# Altium PCB EFNMR_RT_V1.PcbDoc
Units mil, origin at the board's own origin, x right, y up, seen from the top; angles counter-clockwise.
Board outline 3520 x 4010 mil, 2 copper layers (Top Layer, Bottom Layer); 73 components, 53 nets, 220 pads, 258 vias.
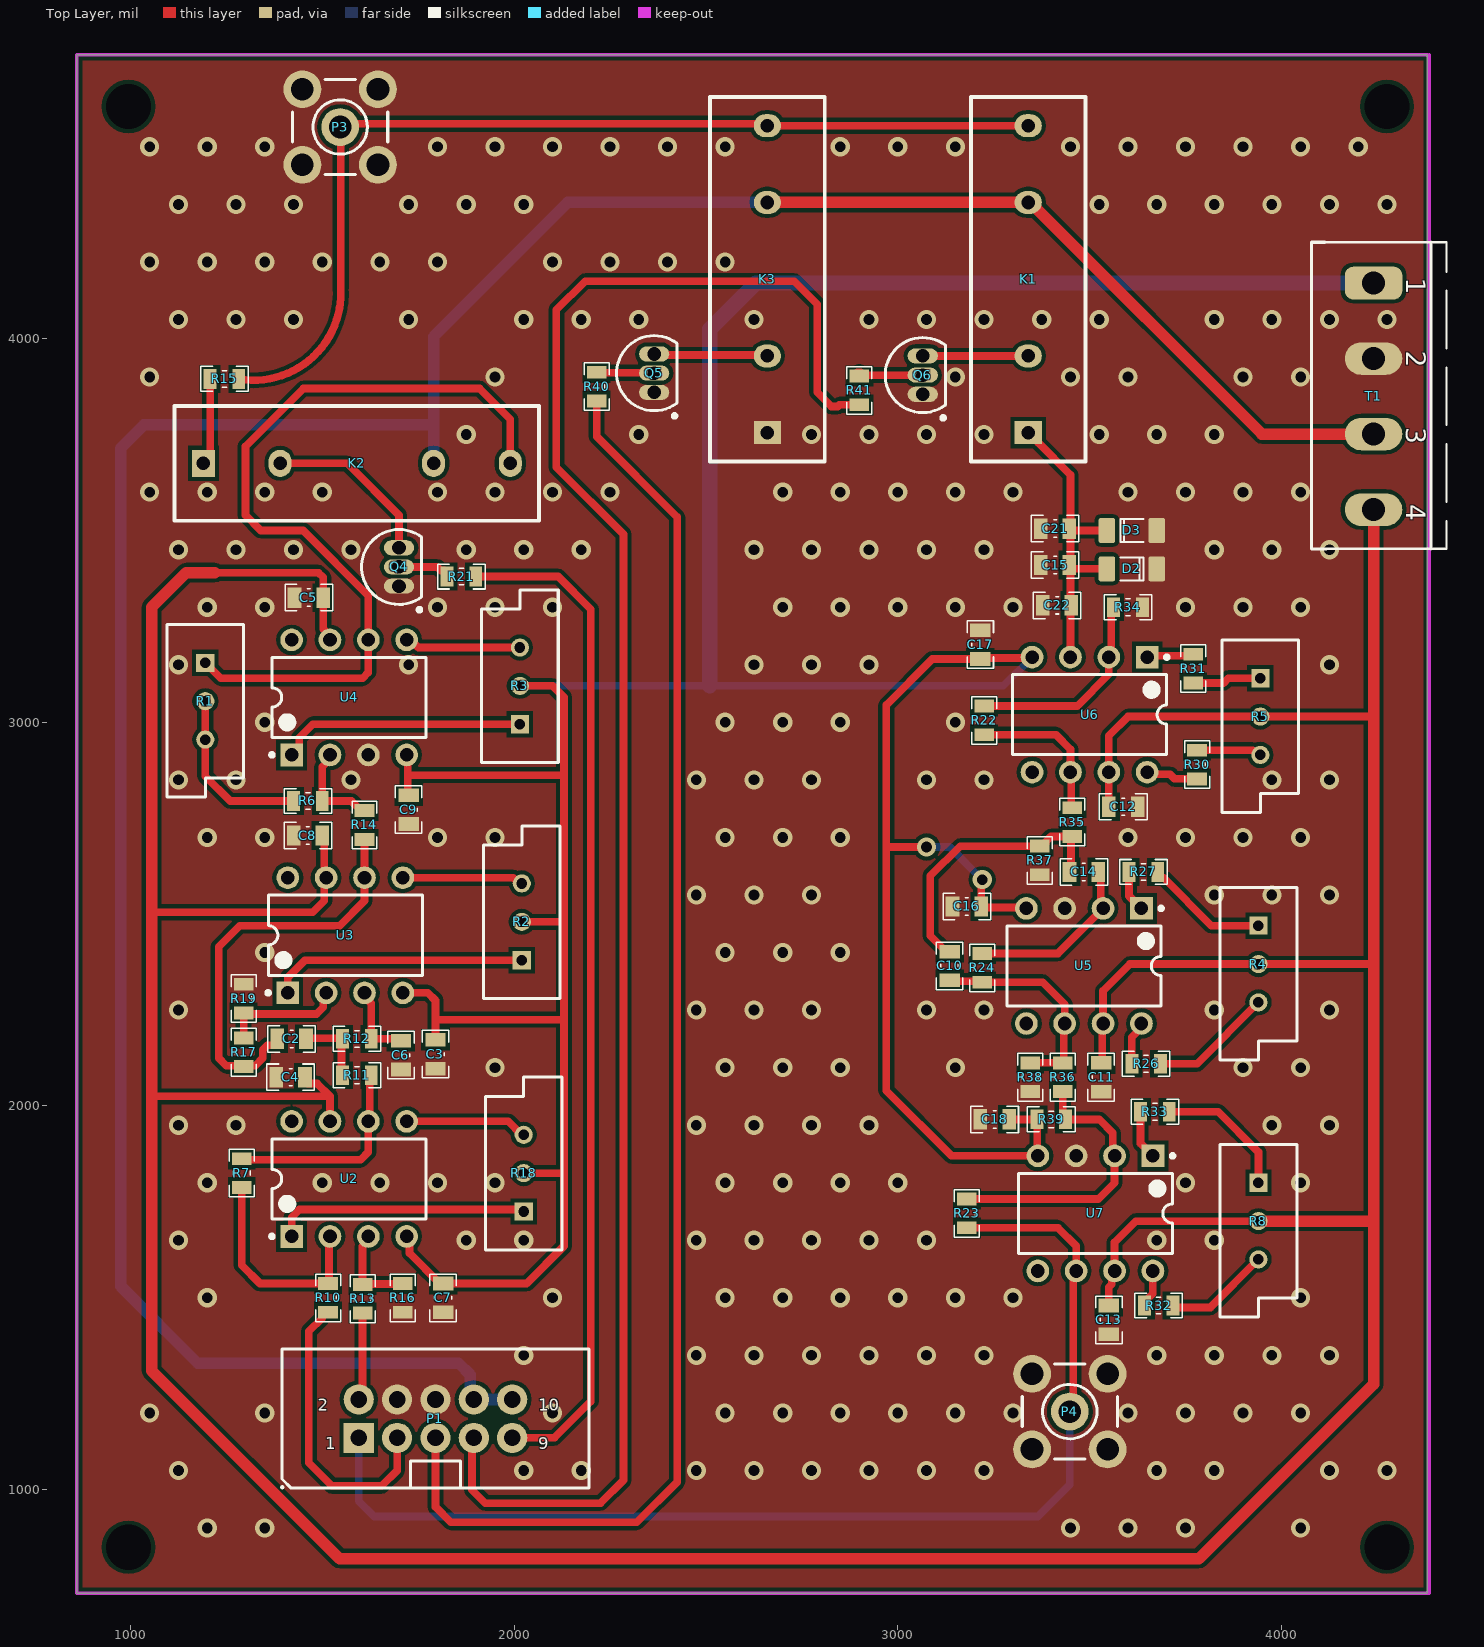
[diagram p0: Top Layer view]
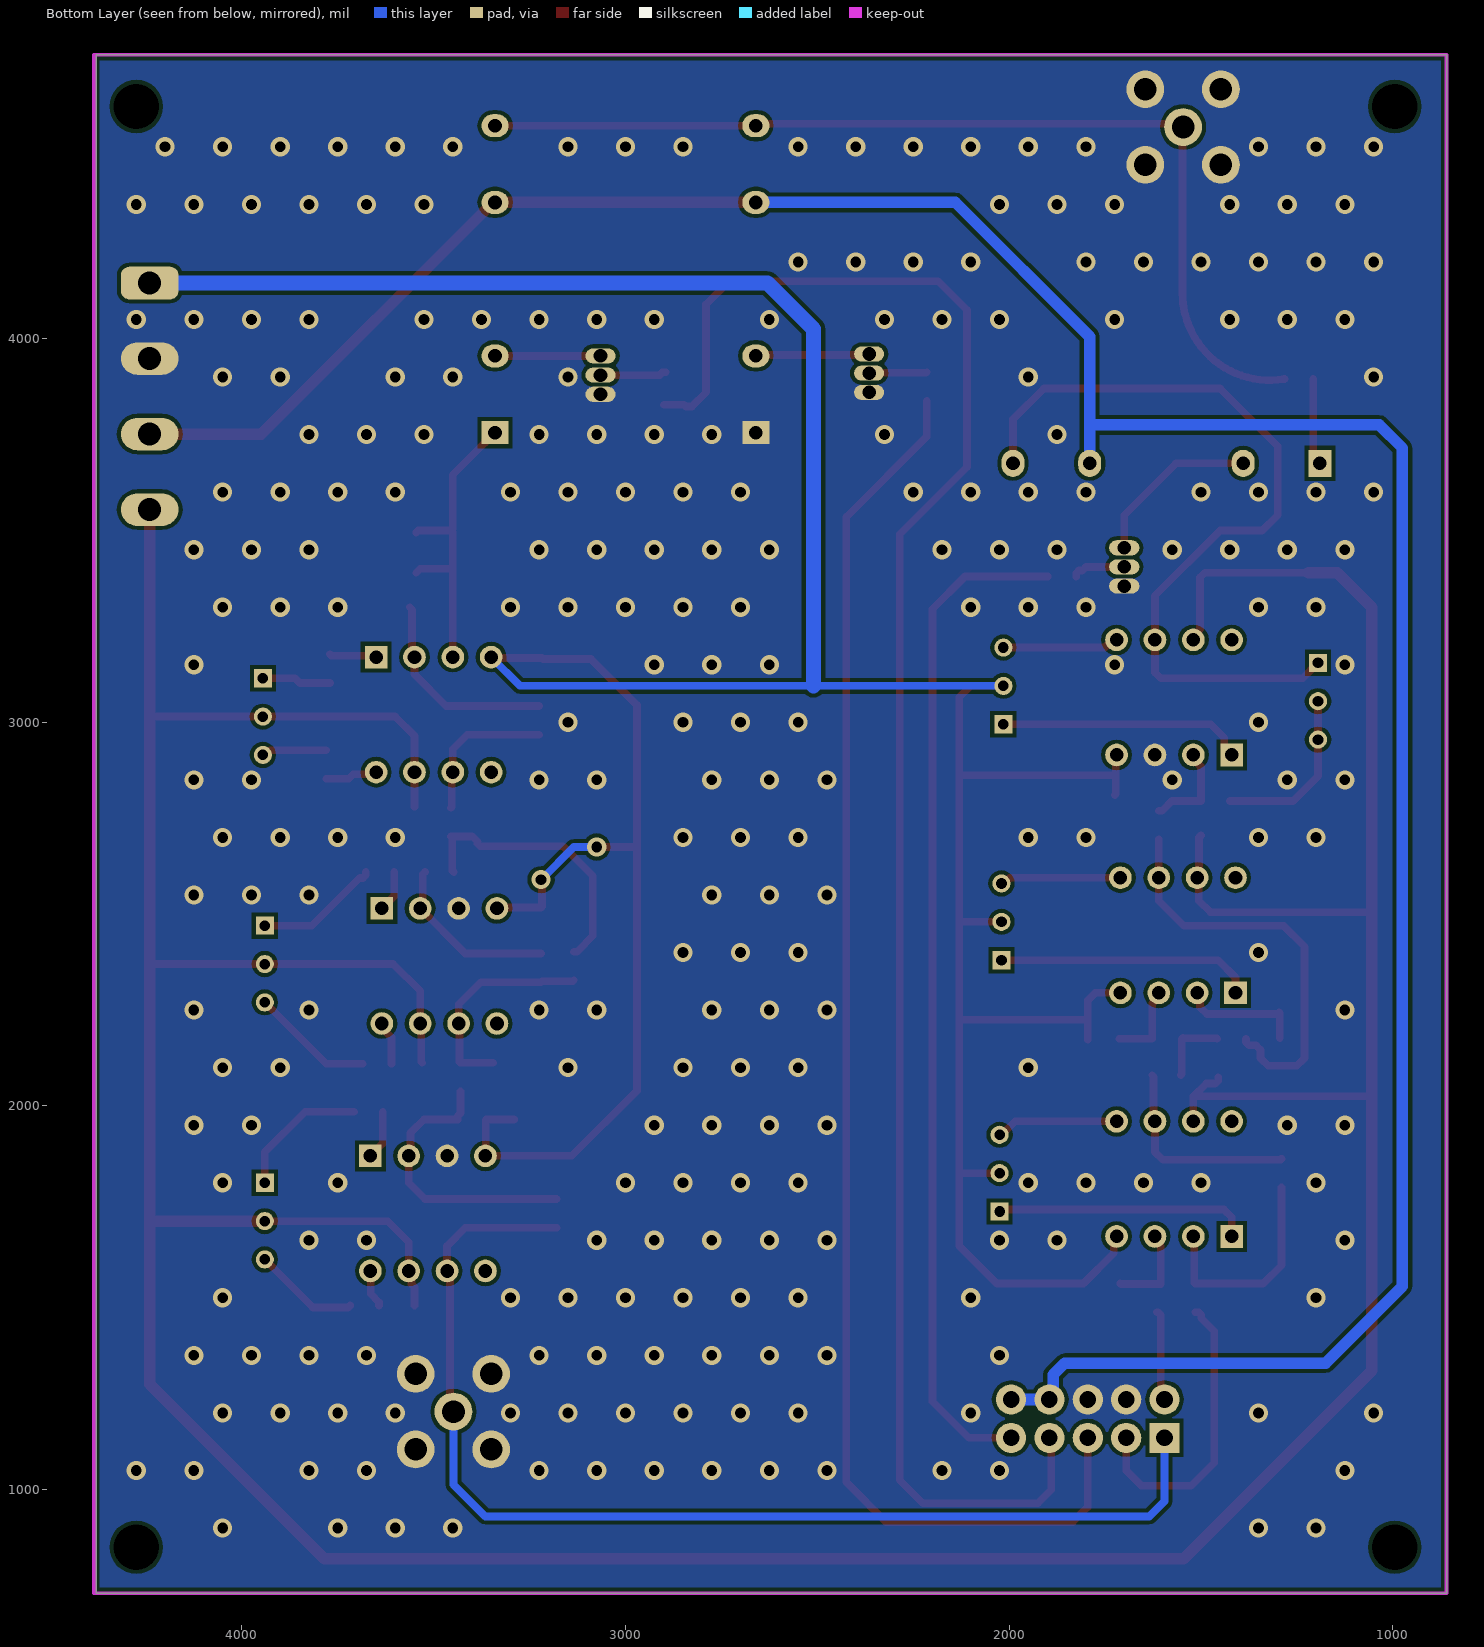
[diagram p1: Bottom Layer view, seen from below]
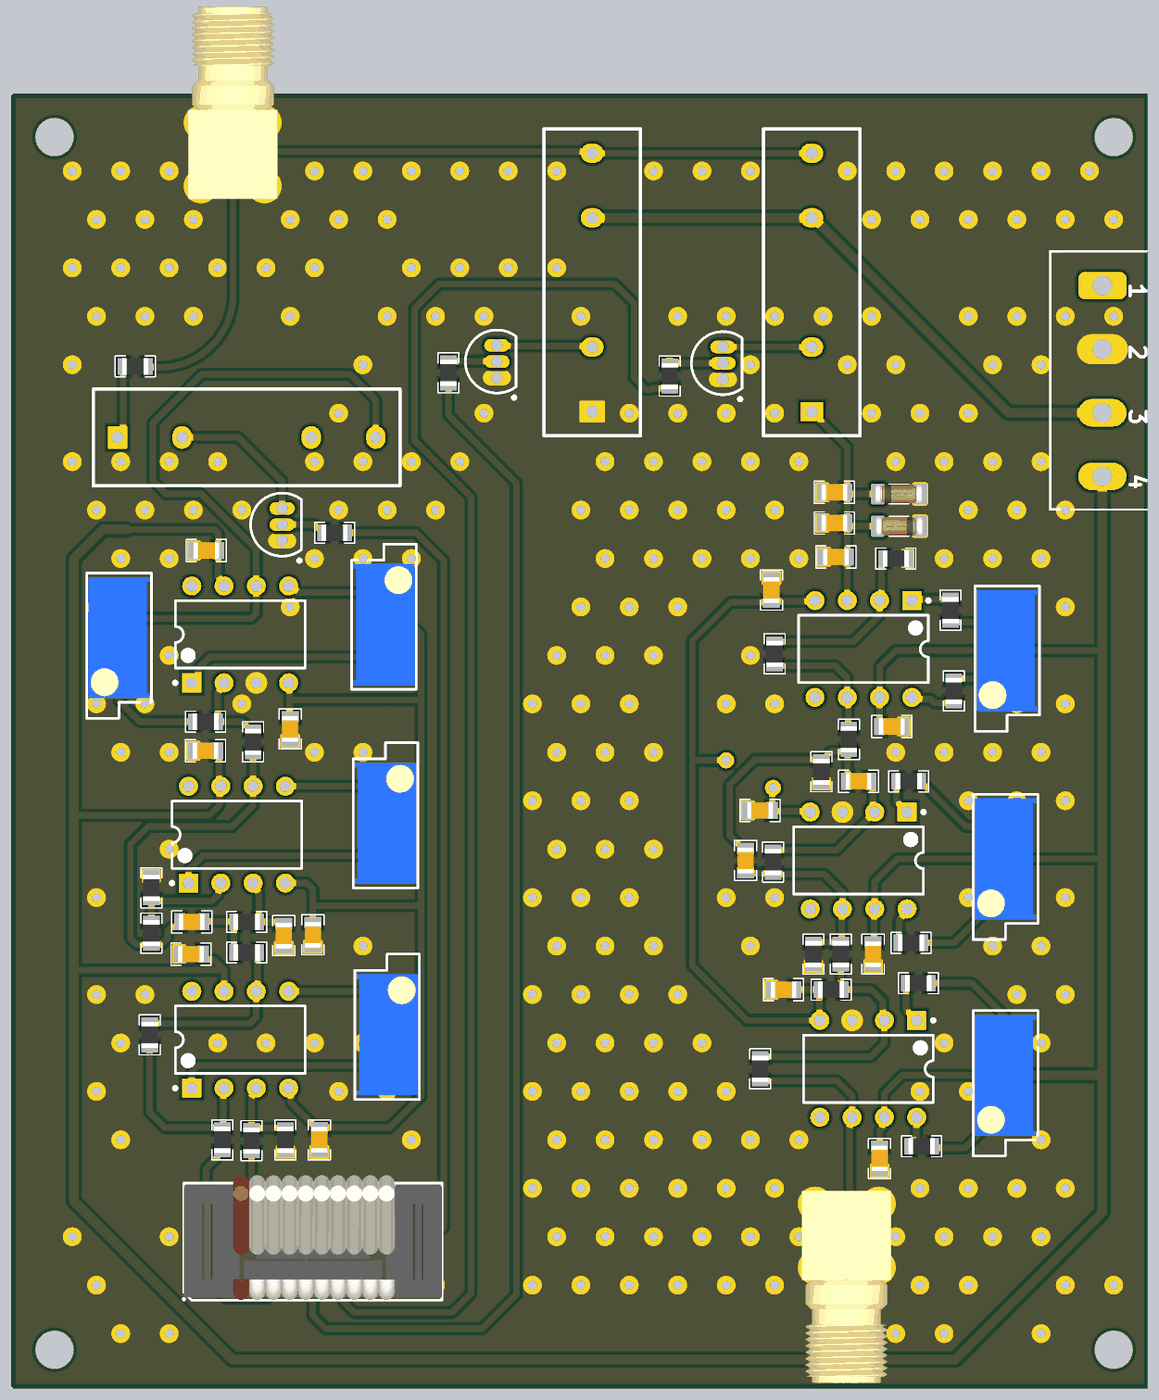
[diagram p2: 3D render of the assembled board from above, using the file's embedded part models]

## Layer stack, top to bottom
Top Solder: solder mask 0.4, Solder Resist, Dk 3.5
Top Layer: signal copper 1.4
Dielectric 1: dielectric 12.6, FR-4, Dk 4.8
Bottom Layer: signal copper 1.4
Bottom Solder: solder mask 0.4, Solder Resist, Dk 3.5

## Board outline
860,730 4380,730 4380,4740 860,4740

## Design rules (kind name [scope] priority, off if disabled: settings)
Clearance [All] p1: gap=10 ignorepadtopadclearanceinfootprint=FALSE except(0: Arc-Hole Track-Hole SMDPad-Hole THPad-Hole Via-Hole Fill-Hole Poly-Hole Region-Hole Text-Hole)
Height [All] p1: minheight=0 maxheight=40000 prefheight=500
PolygonConnect [All] p1: connectstyle=Direct reliefconductorwidth=10 reliefentries=4 polygonreliefangle="90 Angle" airgapwidth=10
RoutingVias [All] p1: holewidth=28 width=50 viastyle="Through Hole" minholewidth=28 minwidth=50 maxholewidth=28 maxwidth=50
SolderMaskExpansion [All] p1: expansion=4
Width [All] p1: maxlimit=100 minlimit=10 preferedwidth=15 minimp=50.000000 maximp=50.000000 favimp=50.000000
29 further rules are at their usual default settings.

## Components (designator, comment, footprint, x,y, rotation, side; value= is the part's Value field where it differs from the comment)
C2 "Cap" CAP0805 1420,2175 r180 top value=1nF
C3 "Cap" CAP0805 1795,2135 r90 top value=100nF
C4 "Cap" CAP0805 1417.6,2075 r0 top value=100nF
C5 "Cap" CAP0805 1465,3325 r0 top value=100nF
C6 "Cap" CAP0805 1705,2132.4 r90 top value=1nF
C7 "Cap" CAP0805 1815,1500 r90 top value=100nF
C8 "Cap" CAP0805 1462.6,2705 r0 top value=100nF
C9 "Cap" CAP0805 1725,2772.4 r90 top value=100nF
C10 "10nF" CAP0805 3135,2365 r270 top
C11 "Cap" CAP0805 3530,2075 r90 top value=100nF
C12 "Cap" CAP0805 3587.6,2780 r180 top value=100nF
C13 "Cap" CAP0805 3550,1442.6 r90 top value=100nF
C14 "10nF" CAP0805 3485,2610 r0 top
C15 "Cap" CAP0805 3410,3410 r180 top value=18nF
C16 "Cap" CAP0805 3180,2520 r0 top value=100nF
C17 "Cap" CAP0805 3215,3202.4 r270 top value=100nF
C18 "Cap" CAP0805 3252.6,1965 r0 top value=100nF
C21 "Cap" CAP0805 3410,3505 r180 top value=18nF
C22 "Cap" CAP0805 3415,3305 r180 top value=18nF
D2 "1N4148" "SOD80, LL-34" 3610,3400 r180 top
D3 "1N4148" "SOD80, LL-34" 3610,3500 r0 top
K1 "Relay-SPST" HE3351A0500 3340,3755 r90 top
K2 "Relay-SPST" HE3351A0500 1190,3675 r0 top
K3 "Relay-SPST" HE3351A0500 2660,3755 r90 top
P1 "Header 5X2" "IDC2.54-10PIN WITH CABLE" 1795,1185 r0 top
P3 "COAX-M" SMA_RA_F 1547.58,4550.58 r90 top
P4 "COAX-M" SMA_RA_F 3447.42,1204.42 r270 top
Q4 "2N3904" TO-92A 1700,3405 r0 top
Q5 "2N3904" TO-92A 2365,3910 r0 top
Q6 "2N3904" TO-92A 3065,3905 r0 top
R1 "RPot" MULTITURN_TRIMMER_3296_132 1195,3155 r270 top value=10K
R2 "RPot" MULTITURN_TRIMMER_3296_132 2020,2380 r90 top value=10K
R3 "RPot" MULTITURN_TRIMMER_3296_132 2015,2995 r90 top value=10K
R4 "RPot" MULTITURN_TRIMMER_3296_132 3940,2470 r270 top value=1K
R5 "RPot" MULTITURN_TRIMMER_3296_132 3945,3115 r270 top value=1K
R6 "10K" RES0805 1462.6,2795 r180 top
R7 "2K" RES0805 1290,1825 r90 top
R8 "RPot" MULTITURN_TRIMMER_3296_132 3940,1800 r270 top value=1K
R10 "2K" RES0805 1515,1500 r90 top
R11 "47K" RES0805 1590,2080 r180 top
R12 "47K" RES0805 1590,2175 r0 top
R13 "2K" RES0805 1605,1497.6 r90 top
R14 "10K" RES0805 1610,2732.4 r90 top
R15 "1K" RES0805 1245,3895 r0 top
R16 "2K" RES0805 1710,1500 r90 top
R17 "12K" RES0805 1295,2140 r90 top
R18 "RPot" MULTITURN_TRIMMER_3296_132 2025,1725 r90 top value=10K
R19 "47K" RES0805 1295,2280 r270 top
R21 "1K" RES0805 1862.4,3380 r0 top
R22 "330K" RES0805 3225,3005 r90 top
R23 "15K" RES0805 3180,1720 r90 top
R24 "150K" RES0805 3220,2360 r90 top
R26 "4.7K" RES0805 3647.4,2110 r180 top
R27 "4.7K" RES0805 3640,2610 r180 top
R30 "4.7K" RES0805 3780,2890 r270 top
R31 "4.7K" RES0805 3770,3140 r90 top
R32 "4.7K" RES0805 3680,1480 r180 top
R33 "4.7K" RES0805 3670,1985 r180 top
R34 "330" RES0805 3600,3300 r180 top
R35 "15K" RES0805 3455,2740 r90 top
R36 "1.5K" RES0805 3430,2075 r90 top
R37 "370" RES0805 3370,2640 r270 top
R38 "2K" RES0805 3345,2075 r270 top
R39 "91K" RES0805 3400,1965 r180 top
R40 "1K" RES0805 2215,3875 r270 top
R41 "1K" RES0805 2900,3865 r270 top
T1 "1753479" "MSTBV 2,5/4-G-5" 4240,3849.72 r270 top
U2 "LF411ACN" LT-N8-8 1570,1810 r90 top
U3 "LF411ACN" LT-N8-8 1560,2445 r90 top
U4 "LF411ACN" LT-N8-8 1570,3065 r90 top
U5 "LT1007CN8" LT-N8-8 3485,2365 r270 top
U6 "LT1007CN8" LT-N8-8 3500,3020 r270 top
U7 "LT1007CN8" LT-N8-8 3515,1720 r270 top

## Footprints (in the part's own frame and the unit in brackets; to place one, negate y for a bottom-side part, rotate by r counter-clockwise, add the part's x,y. Pads: shape width x height; smd on the part's side, far side on the other; paste and mask are expansions set on the pad)
CAP0805 [mm] "Chip Capacitor, 2-Leads, Body 2/00x1/25mm, IPC Medium Density DESIGNER:ABBAS BASEREH"
  rect 0.9x1.35 smd: 1(-0.95,0) 2(0.95,0)
  silkscreen extent -1.58,-0.87 1.58,0.87, body extent -1.02,-0.65 1.02,0.65, height 0.5
HE3351A0500 [mm]
  rect 1.524x1.8 hole 0.9: 1(0,0)
  oval 1.524x1.8 hole 0.9: 2(5.08,0) 3(15.24,0) 4(20.32,0)
  silkscreen extent -1.91,-3.8 22.22,3.8, body extent -1.91,-3.89 22.3,3.89, height 9.75
"IDC2.54-10PIN WITH CABLE" [mm] "Connector; IDC, Low Profile Male Header, Thru-Hole; 10 Position; Vertical; Pitch 2.54 mm; 20.32 x 9.2 x 9.45 mm (LxWxH) DESIGNER : ABBAS BASEREH"
  rect 2x2 hole 1.1: 1(-5.08,-1.27)
  round 2 hole 1.1: 2(-5.08,1.27) 3(-2.54,-1.27) 4(-2.54,1.27) 5(0,-1.27) 6(0,1.27) 7(2.54,-1.27) 8(2.54,1.27) 9(5.08,-1.27) 10(5.08,1.27)
  silkscreen extent -10.16,-4.6 10.16,4.6, body extent -10.15,-4.6 10.17,5.22, height 133.79
LT-N8-8 [mm] "DIP, 8-Leads, Body 10.16x6.48mm, Pitch 2.54mm"
  rect 1.5x1.5 hole 0.9: 1(-3.81,3.81)
  round 1.5 hole 0.9: 2(-3.81,1.27) 3(-3.81,-1.27) 4(-3.81,-3.81) 5(3.81,-3.81) 6(3.81,-1.27) 7(3.81,1.27) 8(3.81,3.81)
  silkscreen extent -3.93,-5.1 2.65,5.23, body extent -3.95,-5.07 3.95,5.07, height 3.94
"MSTBV 2,5/4-G-5" [mil] "Header, Nominal current: 12 A Rated voltage (III/2): 320 V Number of positions: 4 Pitch: 5mm Color: green Contact surface: Tin Assembly: Soldering  DESIGNER ABBAS BASEREH"
  rrect50% 85x150 hole 60: 1(-295.28,0)
  oval 85x150 hole 60: 2(-98.43,0) 3(98.43,0) 4(295.28,0)
  silkscreen extent -402,-161 398,190, body extent -394,-153 394,186, height 472
MULTITURN_TRIMMER_3296_132 [mm]
  rect 1.2x1.2 hole 0.7: 1(0,0)
  round 1.2 hole 0.7: 2(5.08,0) 3(2.54,0)
  silkscreen extent -2.54,-2.54 8.89,2.54, body extent -2.21,-2.41 7.32,2.42, height 11.55
RES0805 [mm] "Chip Resistor, 2-Leads, Body 2/00x1/25mm, IPC Medium Density DESIGNER:ABBAS BASEREH"
  rect 0.85x1.3 smd: 1(-0.95,0) 2(0.95,0)
  silkscreen extent -1.58,-0.82 1.58,0.82, body extent -1.02,-0.65 1.02,0.65, height 0.5
SMA_RA_F [mm]
  round 2.5 hole 1.5: 1(0.025,0.025) 2(-2.475,-2.475) 2(-2.475,2.525) 2(2.525,-2.475) 2(2.525,2.525)
  silkscreen extent -3.12,-3.12 3.18,3.18, body extent -3.48,-3.5 11.62,3.5, height 9.86
"SOD80, LL-34" [mm] "Diode, MiniMELF"
  round 0.5 on Mech15: 0(0,0)
  rrect25% 1.1x1.65 smd: 1(1.65,0) 2(-1.65,0)
  silkscreen extent -0.76,-0.76 0.76,0.76, body extent -1.88,-0.8 1.82,0.8, height 1.6
TO-92A [mm] "TO, Flat Index; 3 In-Line, Axial Leads; Body Dia. 4.5mm; Leads 0.51 x 0.48 mm (max)"
  oval 2x1 hole 0.9: 1(0,-1.27) 2(0,0) 3(0,1.27)
  silkscreen extent -2.48,-2.95 1.5,2.48, body extent -2.48,-2.5 1.5,2.5, height 6.86

## Part data
C2 C3 C4 C5 C6 C7 C8 C9 C11 C12 C13 C15 C16 C17 C18 C21 C22: "Capacitor", LatestRevisionDate=17-Jul-2002, LatestRevisionNote="Re-released for DXP Platform.", PackageDescription="Radial Cap, Thru-Hole; 2 Leads; 0.3 in Pin Spacing", PackageReference=RAD-0.3, Published=8-Jun-2000, Publisher="Altium Limited"
C10 C14: library part Cap, "Capacitor", LatestRevisionDate=17-Jul-2002, LatestRevisionNote="Re-released for DXP Platform.", PackageDescription="Radial Cap, Thru-Hole; 2 Leads; 0.3 in Pin Spacing", PackageReference=RAD-0.3, Published=8-Jun-2000, Publisher="Altium Limited"
D2 D3: "High Conductance Fast Diode", Code_JEDEC=DO-204-AH, ComponentLink1Description="Manufacturer Link", ComponentLink1URL=http://www.fairchildsemi.com/, ComponentLink2Description=Datasheet, ComponentLink2URL=http://www.fairchildsemi.com/ds/1N%2F1N4148.pdf, DatasheetDocument=1997, LatestRevisionDate=17-Jul-2002, LatestRevisionNote="Re-released for DXP Platform.", PackageReference=DO-35, Published=8-Jun-2000, Publisher="Altium Limited"
K1 K2 K3: "Single-Pole Single-Throw Relay", LatestRevisionDate=17-Jul-2002, LatestRevisionNote="Re-released for DXP Platform.", PackageReference=MODULE4, Published=24-Mar-1999, Publisher="Altium Limited"
P1: "Header, 5-Pin, Dual row", LatestRevisionDate=17-Jul-2002, LatestRevisionNote="Re-released for DXP Platform.", Publisher="Altium Limited"
P3 P4: "RF Coaxial PCB Connector, MMCX; Thru-Hole, Vertical Mount Plug,  50 Ohm Impedance", PackageDocument="Rev. A, 16-Jun-1997", ComponentLink1Description="Manufacturer Link", ComponentLink1URL=http://www.amphenolrf.com/, DatasheetDocument=30-May-2003, DrillSize="Corresponds to nominal value.", LatestRevisionDate=15-Jul-2004, LatestRevisionNote="Component Replaced.", PackageReference=908-21103, PCB_Layout="Complies with manufacturer's recommendation.", Published=15-Jul-2004, Publisher="Altium Limited"
Q4 Q5 Q6: "NPN General Purpose Amplifier", ComponentLink1Description="Manufacturer Link", ComponentLink1URL=http://www.fairchildsemi.com/, ComponentLink2Description=Datasheet, ComponentLink2URL=http://www.fairchildsemi.com/ds/2N%2F2N3904.pdf, DatasheetVersion=1997, LatestRevisionDate=15-Jan-2003, LatestRevisionNote="PCB Footprint 'BCY-W3/D4.7' replaced", PackageDescription="TO, Flat Index; 3 In-Line, Axial Leads; Body Dia. 4.5mm; Leads 0.51 x 0.48 mm (max)", PackageReference=TO-92A, PackageVersion=Sep-1998, Published=8-Jun-2000, Publisher="Altium Limited"
R1 R2 R3 R4 R5 R8 R18: "Potentiometer", LatestRevisionDate=17-Jul-2002, LatestRevisionNote="Re-released for DXP Platform.", PackageDescription="Variable Resistor, Thru-Hole; 3 Leads", PackageReference=VR5, Published=8-Jun-2000, Publisher="Altium Limited", Set Position=0.5, Sim Note="Enter the Resistance value and the set point into parameter fields."
R6 R7 R10 R11 R12 R13 R14 R15 R16 R17 R19 R21 R22 R23 R24 R26 R27 R30 R31 R32 R33 R34 R35 R36 R37 R38 R39 R40 R41: library part Res1, "Resistor", LatestRevisionDate=17-Jul-2002, LatestRevisionNote="Re-released for DXP Platform.", PackageDescription="Axial Device, Thru-Hole; 2 Leads; 0.3 in Pin Spacing", PackageReference=AXIAL-0.3, Published=8-Jun-2000, Publisher="Altium Limited"
T1: library part CON_Phoenix_MSTBV_04, "4 Pitch: 5 mm Color: green Contact surface: Tin Assembly", Manufacturer="PHOENIX CONTACT", Max Current="12 A", Voltage="320 V", Category=Connector, ComponentLink1Description="Header, Nominal current: 12 A Rated voltage (III/2): 320 V Number of positions: 4 Pitch: 5 mm Color: green Contact surface: Tin Assembly: Soldering  DESIGNER:ABBAS BASEREH", ComponentLink2Description=Reference, Connector Type="PCB Terminal Block", Designer="ABBAS BASEREH", Mounting Technology=Through-Hole, Part.No=1753479, Pin Count=4, Positions=4, Revision 1=2017-3-1, Status=Unreleased
U2 U3 U4: "Low Offset, Low Drift JFET Input Operational Amplifier, 8-pin MDIP", Manufacturer="National Semiconductor", PackageTopMarking=NSUZXYTTE#*LF*411ACN, PowerWise=N, Code_JEDEC=MS-001-BA, ComponentLink1Description="Manufacturer URL", ComponentLink1URL=http://www.national.com/, ComponentLink2Description="LF411 Datasheet", ComponentLink2URL=http://www.national.com/ds/LF/LF411.pdf, ComponentLink3Description="LF411 Web Page", ComponentLink3URL=http://www.national.com/pf/LF/LF411.html, ComponentLink4Description="N08E Package Page", ComponentLink4URL=http://www.national.com/packaging/folders/n08e.html, CompType=Amplifiers, DatasheetVersion=Aug-2000, High-Reliability=Y, PackageDescription="MDIP, .365 x .250 x .130in, 8 Lead, .100in Pitch", PackageReference=N08E, PackageVersion="revG, May-2006", PartNumber=LF411ACN, PinCount=8, RoHS=N
U5 U6 U7: "Single Channel, Low Noise, High Speed Precision Operational Amplifier, 8 MHz Typical GBW, 2.5 V/us Typical SR, 4 to 44 V, 8-Pin DIP (N8-8), Commerical", Linear Technology Part Number=LT1007, Manufacturer="Linear Technology", Supplier Part Number 1=LT1007CN8-ND, Channels (#)=1, ComponentLink1Description="Manufacturer URL", ComponentLink1URL=http://www.linear.com/, ComponentLink2Description=Datasheet, ComponentLink2URL=http://cds.linear.com/docs/en/datasheet/1007dicedwffa.pdf, ComponentLink3Description="Package Specification", ComponentLink3URL=http://cds.linear.com/docs/en/packaging/05081510_I_N8.pdf, DatasheetVersion="Rev. A", GBW (MHz) Typical=8, Is (mA) Typical=2.6, Mounting Technology="Surface Mount", PackageDescription="8-Lead PDIP, Body 10.16 x 6.48 mm, Pitch 2.54 mm", PackageReference=LT-N8-8, PackageVersion="Rev I", PartNumber=LT1007CN8, SR (V/us) Typical=2.5, Supplier 1=Digi-Key, Type=VFB, Vos (mV) Typical=0.01, Vs Max (V)=44, Vs Min (V)=4

## Free pads (board coordinates)
  round 60 hole 118.11: 2(4275,850) 3(995,850) 4(995,4605) 5(4275,4605)

## Via types
v1: diameter 50, hole 28, Top Layer to Bottom Layer, 258 vias

## Nets (pads, with @x,y where several pads share a name; then routed paths per layer and width w, separated by ;. In a path a pad name is that pad's centre, name@x,y a point inside that pad or via, vN(x,y) a via of type N, cw(c..) or ccw(c..) an arc to the next point about the centre after c; other vN are vias at no path point)
+5VI: K1.3 K2.3 K3.3 P1.8 P1.10 T1.3 | length 7374.3
  Top Layer w30: K3.3 3345.43,4355 3949.13,3751.3 T1.3
  Bottom Layer w30: K2.3 1790,3775 ; P1.10 P1.8 1885.67,1244.33 1885.67,1299.33 1855,1330 1175,1330 975,1530 975,3715 1035,3775 1790,3775 ; K3.3 2140,4355 1790,4005 1790,3775
+12VI: C4.2 C5.2 C8.2 C11.2 C12.2 C13.2 R4.3 R5.3 R8.3 T1.4 U2.7 U3.7 U4.7 U5.7 U6.7 U7.7 | length 12447.7
  Top Layer w20: 1055,2035 1065,2025 1520,2025 ; 1055,2505 1475,2505 1505.47,2535.47 1505.47,2590.47 U3.7 1505,2600 1505,2700 C8.2 ; 1220,3390 1490,3390 1502.4,3377.6 C5.2 1502.4,3243.17 1520,3225.57 U4.7 ; C4.2 1455,2066.14 1462.72,2058.43 1486.57,2058.43 1520,2025 ; U2.7 1520,2025 ; C11.2 3532.5,2114.9 3532.5,2212.5 U5.7 3535,2300 3605,2370 R4.3 4240,2370 ; C13.2 3550,1527.72 3557.53,1535.24 3557.53,1562.53 U7.7 3565,1645 3620,1700 R8.3 ; C12.2 3550.1,2780.1 3550.1,2869.9 U6.7 3550,2965 3600,3015 R5.3 4240,3015
  Top Layer w30: 1220,3390 1145,3390 1055,3300 1055,2505 1055,2035 1055,1310 1545,820 3785,820 4240,1275 4240,1700 4240,2370 4240,3015 T1.4 ; R8.3 4230,1700
-12VI: C3.2 C7.2 C9.2 C16.2 C17.2 C18.2 R2.3 R3.3 R18.3 R39.2 T1.1 U2.4 U3.4 U4.4 U5.4 U6.4 U7.4 | length 9961.8
  Top Layer w20: U3.4 1775,2295 1795,2275 1795,2225 ; U2.4 1727.47,1652.53 1727.47,1616.07 1806.14,1537.4 C7.2 2032.4,1537.4 2130,1635 2130,1825 ; U4.4 1722.5,2912.5 1722.5,2862.4 ; C9.2 1722.5,2812.3 1722.5,2862.4 ; C3.2 1795,2225 ; R3.3 2100,3095 2130,3065 2130,2865 ; R2.3 2130,2480 ; R18.3 2130,1825 ; v1(3075,2675) 2970,2675 ; v1(3220,2590) 3217.4,2587.4 C16.2 3219.9,2517.5 3332.5,2517.5 U5.4 ; C18.2 R39.2 3363.8,1963.8 3363.8,1871.2 3362.6,1870 3140,1870 2970,2040 2970,2675 ; U6.4 3347.5,3167.5 3217.5,3167.5 C17.2 3090,3165 2970,3045 2970,2675 ; 1722.5,2862.4 2127.4,2862.4 2130,2865 ; 1795,2225 2130,2225 ; 2130,1825 2130,2225 ; 2130,2225 2130,2480 ; 2130,2480 2130,2865
  Bottom Layer w20: R3.3 2510,3095 3275,3095 U6.4 ; v1(3075,2675) 3135,2675 v1(3220,2590)
  Bottom Layer w40: 2510,3095 2510,4025 2630,4145 T1.1
Negative: P1.3 R10.1 | length 774.9
  Top Layer w20: R10.1 1506.14,1462.6 1499.41,1455.87 1499.41,1447.01 1465,1412.6 1465,1070 1525,1010 1655,1010 1695,1050 P1.3
NetC2_1: C2.1 R11.2 R12.1 | length 191.6
  Top Layer w20: C2.1 1458.92,2176.52 1546.08,2176.52 1547.6,2178.03 1550.1,2175.53 1550.1,2082.5 R11.2
NetC2_2: C2.2 R14.1 R17.1 U3.6 | length 1087.5
  Top Layer w20: C2.2 1382.6,2166.14 1374.88,2158.43 1356.72,2158.43 1345,2146.71 1345,2125 1325,2105 1250,2105 1230,2125 1230,2415 1285,2470 1545,2470 1610,2535 U3.6 R14.1
NetC6_2: C6.2 R12.2 U3.3 | length 212.4
  Top Layer w20: U3.3 1610,2284.43 1627.4,2267.03 R12.2 C6.2@1712.6,2175
NetC10_1: C10.1 C14.1 R35.1 R37.1 | length 734.4
  Top Layer w20: C10.1 3126.14,2402.4 3085,2443.54 3085,2600 3162.4,2677.4 R37.1 3378.86,2677.4 3385.59,2684.13 3385.59,2688.78 3399.41,2702.6 R35.1 3451.3,2698.9 3451.3,2613.7 C14.1
NetC14_2: C14.2 R24.2 U5.2 | length 463.9
  Top Layer w20: R24.2 3417.4,2397.4 U5.2 3528.7,2521.3 3528.7,2603.7 C14.2
NetC15_1: C15.1 C21.1 C22.1 D2.1 D3.2 K1.1 U6.3 | length 822
  Top Layer w20: K1.1 3345.43,3755 3365.43,3735 3365.43,3729.57 3450,3645 C21.1@3450,3505 ; U6.3 3450,3305 C15.1@3450,3400 ; D2.1@3545.04,3390 3535.04,3400 C15.1@3450,3400 ; D3.2@3545.04,3495 3540.04,3500 3455.12,3500 3450,3494.88 C15.1@3450,3400
NetK1_2: K1.2 Q6.3 | length 275
  Top Layer w20: Q6.3 K1.2
NetK2_1: K2.1 R15.1 | length 227.3
  Top Layer w20: K2.1 1207.6,3692.6 R15.1
NetK2_2: K2.2 Q4.3 | length 450.9
  Top Layer w20: K2.2 1565,3675 1700,3540 Q4.3
NetK2_4: K2.4 R1.1 U4.6 | length 2135
  Top Layer w20: R1.1 1235,3115 1605,3115 1620,3130 U4.6 1620,3330 1450,3500 1340,3500 1300,3540 1300,3720 1450,3870 1910,3870 1990,3790 K2.4
NetK3_2: K3.2 Q5.3 | length 297.1
  Top Layer w20: Q5.3 2367.5,3957.5 2657.5,3957.5 K3.2
NetQ4_2: Q4.2 R21.1 | length 140.5
  Top Layer w20: Q4.2 1800,3405 1809.41,3395.59 1818.27,3395.59 1825,3388.86 R21.1
NetQ5_2: Q5.2 R40.1 | length 151
  Top Layer w20: R40.1 2216.2,3911.2 2363.8,3911.2 Q5.2
NetQ6_2: Q6.2 R41.1 | length 173.1
  Top Layer w20: R41.1@2895,3912.4 2903.86,3912.4 2911.26,3905 Q6.2
NetR1_2: R1.2 R1.3 R6.2 | length 452.1
  Top Layer w20: R1.3 R1.2 1195,2860 1260,2795 R6.2
NetR2_1: R2.1 U3.1 | length 668.6
  Top Layer w20: U3.1 1410,2335 1455,2380 R2.1
NetR2_2: R2.2 U3.5 | length 316.2
  Top Layer w20: U3.5 1997.63,2595 2012.63,2580 R2.2
NetR3_1: R3.1 U4.1 | length 642.8
  Top Layer w20: U4.1 1439.53,2934.53 1439.53,2959.53 1475,2995 R3.1
NetR3_2: R3.2 U4.5 | length 303.3
  Top Layer w20: U4.5 1730.57,3215 1750.57,3195 R3.2
NetR4_1: R4.1 R27.1 | length 325.8
  Top Layer w20: R27.1 3677.4,2601.14 3684.13,2594.41 3692.99,2594.41 3817.4,2470 R4.1
NetR4_2: R4.2 R26.1 | length 321.5
  Top Layer w20: R26.1 3780,2110 R4.2
NetR5_1: R5.1 R31.1 | length 180.1
  Top Layer w20: R31.1 3848.92,3102.6 3861.32,3115 R5.1
NetR5_2: R5.2 R30.1 | length 170.1
  Top Layer w20: R30.1 3925.23,2927.4 3937.63,2915 R5.2
NetR6_1: R6.1 R14.2 U4.2 | length 248.7
  Top Layer w20: U4.2 1520,2904.43 1500,2884.43 R6.1 1575.94,2795 1601.14,2769.8 R14.2
NetR7_1: R7.1 R10.2 U2.2 | length 572
  Top Layer w20: R7.1 1290,1585 1337.6,1537.4 R10.2 1517.5,1539.9 1517.5,1657.5 U2.2
NetR7_2: R7.2 R11.1 U2.6 | length 542.3
  Top Layer w20: R7.2 1292.4,1860 1600,1860 1620,1880 U2.6 1623.7,1963.7 1623.7,2076.3 R11.1
NetR8_1: R8.1 R33.1 | length 356.1
  Top Layer w20: R33.1 3835,1985 3940,1880 R8.1
NetR8_2: R8.2 R32.1 | length 276.4
  Top Layer w20: R32.1 3722.4,1475 3815,1475 R8.2
NetR13_2: R13.2 R16.2 U2.3 | length 237.2
  Top Layer w20: U2.3 1620,1649.43 1605,1634.43 R13.2 1606.2,1536.2 1708.8,1536.2 R16.2
NetR17_2: R17.2 R19.2 U3.2 | length 322.3
  Top Layer w20: R17.2 R19.2@1295,2240 ; R19.2@1296.2,2243.8 R19.2 R19.2@1295,2240 ; U3.2 1502.53,2287.53 1502.53,2257.53 1485,2240 R19.2@1295,2240
NetR18_1: R18.1 U2.1 | length 665.4
  Top Layer w20: U2.1 1420,1710 1440,1730 2020,1730 R18.1
NetR18_2: R18.2 U2.5 | length 319.5
  Top Layer w20: U2.5 1984.17,1960 2019.17,1925 R18.2
NetR22_1: R22.1 R35.2 U6.6 | length 395.2
  Top Layer w20: R22.1 3412.4,2967.6 3450,2930 U6.6 3452.5,2867.5 3452.5,2779.9 R35.2
NetR22_2: R22.2 R34.2 U6.2 | length 539.4
  Top Layer w20: R22.2 3467.4,3042.4 3550,3125 U6.2 3556.3,3176.3 3556.3,3293.7 R34.2
NetR23_2: R23.2 R36.1 R39.1 U7.2 | length 747.5
  Top Layer w20: R23.2 3522.4,1757.4 3565,1800 U7.2 3560.47,1874.53 3560.47,1929.53 3525,1965 R39.1 3437.4,1973.86 3430,1981.26 R36.1
NetR26_2: R26.2 U5.8 | length 115.4
  Top Layer w20: R26.2 3610,2179.43 3635,2204.43 U5.8
NetR27_2: R27.2 U5.1 | length 108.4
  Top Layer w20: R27.2 3602.6,2547.4 U5.1
NetR30_2: R30.2 U6.8 | length 137.2
  Top Layer w20: U6.8 3655.74,2864.26 3709.53,2864.26 3721.19,2852.6 R30.2
NetR31_2: R31.2 U6.1 | length 123.1
  Top Layer w20: U6.1 3653.7,3173.7 3766.3,3173.7 R31.2
NetR32_2: R32.2 U7.8 | length 99.3
  Top Layer w20: R32.2 3642.6,1488.86 3664.21,1510.47 3664.21,1569.21 U7.8
NetR33_2: R33.2 U7.1 | length 128.4
  Top Layer w20: R33.2 3632.6,1902.4 U7.1
OUT_BANDPASS: C10.2 R24.1 R36.2 R38.1 U5.6 | length 565.6
  Top Layer w20: C10.2 3137.5,2325.1 3217.5,2325.1 R24.1 3377.4,2322.6 3435,2265 U5.6 3432.5,2212.5 3432.5,2114.9 R36.2 R38.1
Positive: P1.2 R13.1 | length 237.8
  Top Layer w20: P1.2 1605,1245 1605,1455.87 1611.73,1462.6 R13.1@1615,1462.6
Receiver_EN: P1.7 R41.2 | length 4786.8
  Top Layer w20: P1.7 1890,1130 1890,1000 1925,965 2225,965 2285,1025 2285,3490 2110,3665 2110,4075 2185,4150 2730,4150 2790,4090 2790,3860 2826.72,3823.28 2843.28,3823.28 2847.6,3827.6 R41.2
SGND: C3.1 C4.1 C5.1 C6.1 C7.1 C8.1 C9.1 C11.1 C12.1 C13.1 C15.2 C16.1 C17.1 C18.1 C21.2 C22.2 D2.2 D3.1 K3.1 P1.4 P1.6 P3.2 P4.2 Q4.1 Q5.1 Q6.1 R16.1 R19.1 R34.1 R37.2 R38.2 T1.2 U4.3 U5.3 U7.3
  other v1: 1200,900 1350,900 3450,900 3600,900 3750,900 4050,900 1125,1050 2025,1050 2175,1050 2475,1050 2625,1050 2775,1050 2925,1050 3075,1050 3225,1050 3675,1050 3825,1050 4125,1050 4275,1050 1050,1200 1350,1200 2100,1200 2550,1200 2700,1200 2850,1200 3000,1200 3150,1200 3300,1200 3600,1200 3750,1200 3900,1200 4050,1200 2025,1350 2475,1350 2625,1350 2775,1350 2925,1350 3075,1350 3225,1350 3675,1350 3825,1350 3975,1350 4125,1350 1200,1500 2100,1500 2550,1500 2700,1500 2850,1500 3000,1500 3150,1500 3300,1500 4050,1500 1125,1650 1875,1650 2025,1650 2475,1650 2625,1650 2775,1650 2925,1650 3075,1650 3675,1650 3825,1650 1200,1800 1500,1800 1650,1800 1800,1800 1950,1800 2550,1800 2700,1800 2850,1800 3000,1800 3750,1800 4050,1800 1125,1950 1275,1950 2475,1950 2625,1950 2775,1950 2925,1950 3975,1950 4125,1950 1950,2100 2550,2100 2700,2100 2850,2100 3150,2100 3900,2100 4050,2100 1125,2250 2475,2250 2625,2250 2775,2250 3075,2250 3225,2250 3825,2250 4125,2250 1350,2400 2550,2400 2700,2400 2850,2400 2475,2550 2625,2550 2775,2550 3825,2550 3975,2550 4125,2550 1200,2700 1350,2700 1800,2700 1950,2700 2550,2700 2700,2700 2850,2700 3600,2700 3750,2700 3900,2700 4050,2700 1125,2850 1275,2850 1575,2850 2475,2850 2625,2850 2775,2850 3075,2850 3225,2850 3975,2850 4125,2850 1350,3000 2550,3000 2700,3000 2850,3000 3150,3000 1125,3150 1725,3150 2625,3150 2775,3150 2925,3150 4125,3150 1200,3300 1350,3300 1800,3300 1950,3300 2100,3300 2700,3300 2850,3300 3000,3300 3150,3300 3300,3300 3750,3300 3900,3300 4050,3300 1125,3450 1275,3450 1425,3450 1575,3450 1875,3450 2025,3450 2175,3450 2625,3450 2775,3450 2925,3450 3075,3450 3225,3450 3825,3450 3975,3450 4125,3450 1050,3600 1200,3600 1350,3600 1500,3600 1800,3600 1950,3600 2100,3600 2250,3600 2700,3600 2850,3600 3000,3600 3150,3600 3300,3600 3600,3600 3750,3600 3900,3600 4050,3600 1875,3750 2325,3750 2775,3750 2925,3750 3075,3750 3225,3750 3525,3750 3675,3750 3825,3750 1050,3900 1950,3900 3150,3900 3450,3900 3600,3900 3900,3900 4050,3900 1125,4050 1275,4050 1425,4050 1725,4050 2025,4050 2175,4050 2325,4050 2625,4050 2925,4050 3075,4050 3225,4050 3375,4050 3525,4050 3825,4050 3975,4050 4125,4050 4275,4050 1050,4200 1200,4200 1350,4200 1500,4200 1650,4200 1800,4200 2100,4200 2250,4200 2400,4200 2550,4200 1125,4350 1275,4350 1425,4350 1725,4350 1875,4350 2025,4350 3525,4350 3675,4350 3825,4350 3975,4350 4125,4350 4275,4350 1050,4500 1200,4500 1350,4500 1800,4500 1950,4500 2100,4500 2250,4500 2400,4500 2550,4500 2850,4500 3000,4500 3150,4500 3450,4500 3600,4500 3750,4500 3900,4500 4050,4500 4200,4500
Short_receriver: P1.5 R40.2 | length 3774.6
  Top Layer w20: P1.5 1795,955 1835,915 2320,915 2425,1020 2425,3535 2215,3745 R40.2
To_ADC: P1.1 P4.1 R23.1 U7.6 | length 3002.7
  Top Layer w20: R23.1 3417.4,1682.6 3465,1635 U7.6 3457.53,1562.53 3457.53,1212.53 P4.1
  Bottom Layer w20: P1.1 1595,970 1635,930 3365,930 3448.42,1013.42 P4.1
TR_coil: K1.4 K3.4 P3.1 R15.2 | length 2645.3
  Top Layer w20: R15.2 ccw(c1320.89,4119.11) 1545,4080.61 ccw(c1320.89,4119.11) 1548,4130.4 1548,4537 P3.1@1535,4550 ; P3.1 1555,4560 K3.4@2665,4560 ; K3.4@2665,4550 K3.4 3330,4555 K1.4@3340,4545
Transmit_EN: P1.9 R21.2 | length 2644.8
  Top Layer w20: R21.2 2115,3380 2200,3295 2200,1230 2105,1135 P1.9
pads on no net: D2.0 D3.0 U2.8 U3.8 U4.8 U5.5 U6.5 U7.5

## Polygon pours and split planes (outlines as drawn)
SGND on Top Layer (solid, pour order 0): 4380,4740 4385,4735 4385,730 860,730 860,4740
SGND on Bottom Layer (solid, pour order 2): 860,4740 860,730 4385,730 4385,4735 4380,4740

## Keep-outs
Keep-Out Layer:
  lines w10: 4380,4740 860,4740 860,730 4385,730 4385,4740

## Dimensions
860,730 to 860,4740 on Top Overlay
4385,4740 to 860,4740 on Top Overlay

## Text inside footprints (layer, text, board x,y; h text height)
P1: Top Overlay "9" at 2062.24,1105.47 h31.5; Top Overlay "10" at 2062.24,1205.47 h31.5; Top Overlay "1" at 1508.08,1105.47 h31.5; Top Overlay "2" at 1488.4,1205.47 h31.5
T1: Top Overlay "1" at 4325.24,4158.86 h50 r270; Top Overlay "2" at 4325.24,3968.86 h50 r270; Top Overlay "3" at 4325.24,3768.86 h50 r270; Top Overlay "4" at 4325.24,3568.86 h50 r270